# Altium PCB LKS_DEMO_V5.0.PcbDoc (part 3 of 4)
Units mil, origin at the board's own origin, x right, y up, seen from the top; angles counter-clockwise.
Board outline 5414.8 x 3354.56 mil, 2 copper layers (Top Layer, Bottom Layer); 131 components, 85 nets, 355 pads, 272 vias.
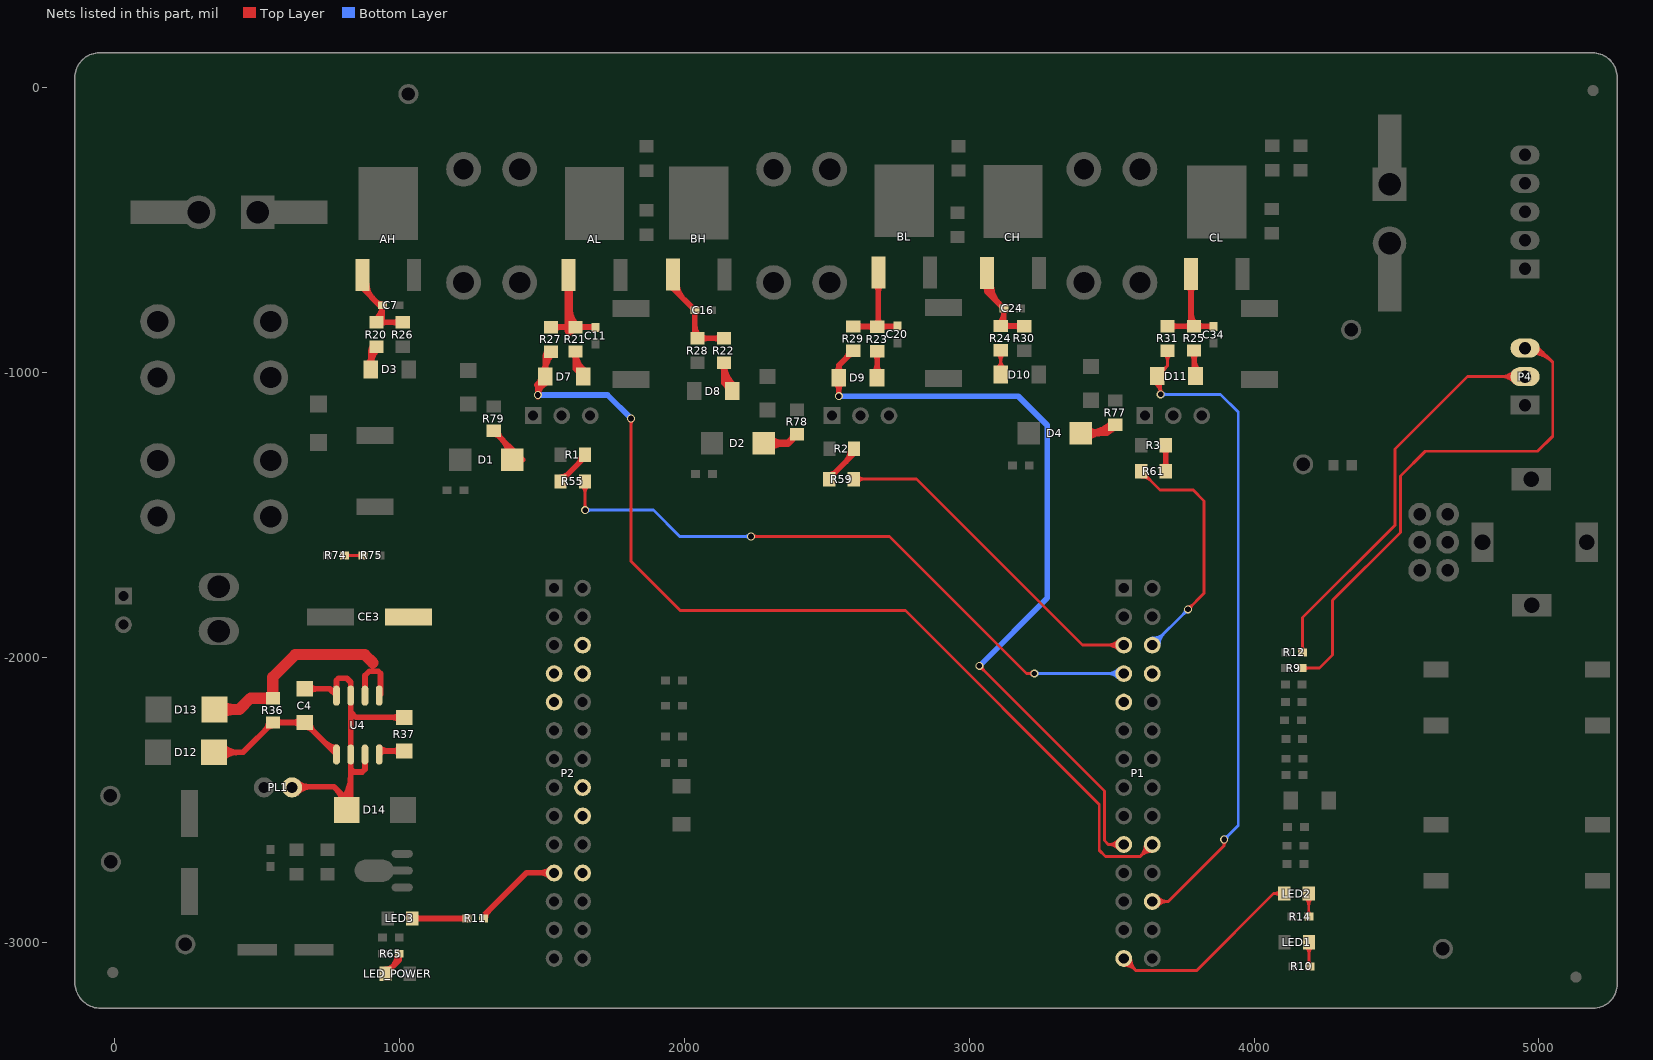
[diagram p3: the nets of this part, all layers, seen from the top]

## Via types
v1: diameter 26, hole 18, Top Layer to Bottom Layer, 117 vias
v2: diameter 28, hole 20, Top Layer to Bottom Layer, 77 vias
v3: diameter 28, hole 18, Top Layer to Bottom Layer, 73 vias
v4: diameter 23.62, hole 11.81, Top Layer to Bottom Layer, 5 vias

## Nets (pads, with @x,y where several pads share a name; then routed paths per layer and width w, separated by ;. In a path a pad name is that pad's centre, name@x,y a point inside that pad or via, vN(x,y) a via of type N, cw(c..) or ccw(c..) an arc to the next point about the centre after c; other vN are vias at no path point) (continued)
LED2: LED2.1 P1.14 | length 1103.3
  Top Layer w10: P1.14@3542.25,-3056.82 3584.65,-3099.22 3798.25,-3099.22 4068.35,-2829.12 ; LED2.1@4105.98,-2829.12 4068.35,-2829.12 ; 3567.05,-3081.62 ccw(c3542.25,-3106.42) 3542.25,-3071.34 cw(c3542.25,-3106.42) 3567.05,-3081.62 ; 3567.05,-3081.62 cw(c3591.85,-3056.82) 3556.78,-3056.82 ccw(c3591.85,-3056.82) 3567.05,-3081.62 ; 3584.12,-3098.69 ccw(c3542.25,-3140.56) 3542.25,-3081.34 cw(c3542.25,-3140.56) 3584.12,-3098.69 ; 3584.12,-3098.69 cw(c3625.99,-3056.82) 3566.78,-3056.82 ccw(c3625.99,-3056.82) 3584.12,-3098.69 ; 4068.35,-2829.12 ccw(c4068.35,-2794.93) 4093.65,-2817.92 cw(c4068.35,-2794.93) 4068.35,-2829.12 ; 4068.35,-2829.12 cw(c4068.35,-2863.3) 4093.65,-2840.31 ccw(c4068.35,-2863.3) 4068.35,-2829.12
LED3: P2.11 R11.2 | length 526.2
  Top Layer w20: R11.2@1295.18,-2916.6 1295.18,-2906.6 1446.24,-2755.53 P2.11@1540.97,-2755.53 ; R11.2@1300.93,-2916.6 cw(c1338.95,-2916.6) 1312.06,-2889.71 ccw(c1338.95,-2916.6) R11.2@1300.93,-2916.6 ; 1492.01,-2755.53 cw(c1492.01,-2807.06) 1528.44,-2770.62 ccw(c1492.01,-2807.06) 1492.01,-2755.53 ; 1498.2,-2755.53 ccw(c1498.2,-2712.77) 1528.44,-2743.01 cw(c1498.2,-2712.77) 1498.2,-2755.53
LO1: D11.2 P1.26 R31.1 | length 3359.8
  Top Layer w10: P1.26@3642.25,-2856.82 3698.24,-2856.82 ; v2(3671.64,-1076.41) 3671.63,-1023.64 D11.2@3660.13,-1012.14 3696.16,-976.11 ; R31.1@3696.16,-923.03 3696.16,-976.11 ; v2(3894.93,-2639.57) 3894.93,-2660.12 ; 3671.63,-1054.66 ccw(c3693.39,-1054.66) 3678,-1070.04 cw(c3693.39,-1054.66) 3671.63,-1054.66 ; 3671.63,-1054.7 cw(c3649.93,-1054.7) 3665.28,-1070.04 ccw(c3649.93,-1054.7) 3671.63,-1054.7 ; 3675.41,-2856.82 ccw(c3675.41,-2887.4) 3652.93,-2866.66 cw(c3675.41,-2887.4) 3675.41,-2856.82 ; 3675.41,-2856.82 cw(c3675.41,-2826.23) 3652.93,-2846.97 ccw(c3675.41,-2826.23) 3675.41,-2856.82 ; 3696.16,-976.11 cw(c3670.73,-950.68) 3663.99,-986.01 ccw(c3670.73,-950.68) 3696.16,-976.11 ; 3696.16,-963.23 ccw(c3655.95,-963.23) 3684.38,-934.8 cw(c3655.95,-963.23) 3696.16,-963.23 ; 3696.16,-963.23 cw(c3736.37,-963.23) 3707.94,-934.8 ccw(c3736.37,-963.23) 3696.16,-963.23 ; 3698.24,-2856.82 ccw(c3698.24,-2908.45) 3660.28,-2873.44 cw(c3698.24,-2908.45) 3698.24,-2856.82 ; 3698.24,-2856.82 cw(c3698.24,-2805.18) 3660.28,-2840.19 ccw(c3698.24,-2805.18) 3698.24,-2856.82 ; 3698.24,-2856.82 3894.93,-2660.12 ; 3894.93,-2660.12 ccw(c3875.97,-2660.12) 3888.83,-2646.19 cw(c3875.97,-2660.12) 3894.93,-2660.12 ; 3894.93,-2660.12 cw(c3913.89,-2660.12) 3901.03,-2646.19 ccw(c3913.89,-2660.12) 3894.93,-2660.12 ; D11.2@3648.83,-1035.25 cw(c3621.06,-1077.52) 3671.63,-1077.52 ccw(c3621.06,-1077.52) D11.2@3648.83,-1035.25 ; D11.2@3654.32,-1026.9 cw(c3633.24,-1058.99) 3671.63,-1058.99 ccw(c3633.24,-1058.99) D11.2@3654.32,-1026.9 ; D11.2@3662.12,-995.83 ccw(c3666.45,-973.11) 3682.8,-989.47 cw(c3666.45,-973.11) D11.2@3662.12,-995.83 ; D11.2@3680.72,-1006.23 cw(c3716.17,-1006.23) 3691.11,-981.16 ccw(c3716.17,-1006.23) D11.2@3680.72,-1006.23
  Bottom Layer w10: v2(3671.64,-1076.41) 3882.12,-1076.41 3944.39,-1138.68 3944.39,-2590.11 v2(3894.93,-2639.57) ; 3693.37,-1076.41 ccw(c3693.37,-1098.14) 3678,-1082.77 cw(c3693.37,-1098.14) 3693.37,-1076.41 ; 3693.37,-1076.41 cw(c3693.37,-1054.68) 3678,-1070.04 ccw(c3693.37,-1054.68) 3693.37,-1076.41 ; 3910.29,-2624.21 ccw(c3925.66,-2639.57) 3903.93,-2639.57 cw(c3925.66,-2639.57) 3910.29,-2624.21 ; 3910.29,-2624.21 cw(c3894.93,-2608.85) 3894.93,-2630.57 ccw(c3894.93,-2608.85) 3910.29,-2624.21
LO2: D9.2 P1.10 R29.1 | length 3418.4
  Top Layer w10: v2(3035.34,-2029.67) 3474.16,-2468.49 3474.16,-2643.33 3487.65,-2656.82 ; P1.10@3542.25,-2656.82 3487.65,-2656.82 ; 3050.71,-2045.04 ccw(c3035.34,-2060.4) 3035.34,-2038.67 cw(c3035.34,-2060.4) 3050.71,-2045.04 ; 3050.71,-2045.04 cw(c3066.07,-2029.67) 3044.34,-2029.67 ccw(c3066.07,-2029.67) 3050.71,-2045.04 ; 3487.65,-2656.82 ccw(c3487.65,-2608.31) 3523.91,-2640.53 cw(c3487.65,-2608.31) 3487.65,-2656.82 ; 3487.65,-2656.82 cw(c3487.65,-2705.32) 3523.91,-2673.11 ccw(c3487.65,-2705.32) 3487.65,-2656.82 ; 3509.91,-2656.82 ccw(c3509.91,-2628.09) 3531.39,-2647.17 cw(c3509.91,-2628.09) 3509.91,-2656.82 ; 3509.91,-2656.82 cw(c3509.91,-2685.55) 3531.39,-2666.46 ccw(c3509.91,-2685.55) 3509.91,-2656.82
  Top Layer w20: v2@2542,-1080.2 D9.2@2542,-1018.22 2542,-974.29 R29.1@2592.71,-923.58 ; 2542,-1061.76 ccw(c2504.36,-1061.76) 2530.98,-1035.15 cw(c2504.36,-1061.76) 2542,-1061.76 ; 2542,-1061.76 cw(c2579.64,-1061.76) 2553.03,-1035.15 ccw(c2579.64,-1061.76) 2542,-1061.76 ; 2542,-974.67 ccw(c2579.64,-974.67) 2553.03,-1001.29 cw(c2579.64,-974.67) 2542,-974.67 ; 2542,-974.67 cw(c2504.36,-974.67) 2530.98,-1001.29 ccw(c2504.36,-974.67) 2542,-974.67 ; 2567.1,-949.19 ccw(c2541.5,-923.58) 2577.71,-923.58 cw(c2541.5,-923.58) 2567.1,-949.19 ; R29.1@2575.18,-941.11 cw(c2589.36,-955.29) 2589.36,-935.24 ccw(c2589.36,-955.29) R29.1@2575.18,-941.11
  Bottom Layer w20: v2(2541.86,-1082.8) 3171.74,-1082.8 3273.63,-1184.7 3273.63,-1791.37 v2(3035.34,-2029.67)
LO3: D7.2 P1.24 R27.1 | length 4384.4
  Top Layer w10: v2(1812.37,-1160.96) 1812.37,-1662.33 1985.23,-1835.2 2775.6,-1835.2 3456.28,-2515.88 3456.28,-2677.23 3478.27,-2699.22 3599.85,-2699.22 P1.24@3638.22,-2660.84 ; 1812.37,-1182.68 ccw(c1790.64,-1182.68) 1806,-1167.32 cw(c1790.64,-1182.68) 1812.37,-1182.68 ; 1812.37,-1182.68 cw(c1834.1,-1182.68) 1818.73,-1167.32 ccw(c1834.1,-1182.68) 1812.37,-1182.68 ; 3600.38,-2698.69 ccw(c3558.51,-2656.82) 3617.72,-2656.82 cw(c3558.51,-2656.82) 3600.38,-2698.69 ; 3600.38,-2698.69 cw(c3642.25,-2740.56) 3642.25,-2681.34 ccw(c3642.25,-2740.56) 3600.38,-2698.69 ; 3617.45,-2681.62 ccw(c3592.65,-2656.82) 3627.72,-2656.82 cw(c3592.65,-2656.82) 3617.45,-2681.62 ; 3617.45,-2681.62 cw(c3642.25,-2706.42) 3642.25,-2671.34 ccw(c3642.25,-2706.42) 3617.45,-2681.62
  Top Layer w20: v2(1485.26,-1078.73) 1485.25,-1040.35 D7.2@1511.3,-1014.31 1511.3,-946.61 R27.1@1531.29,-926.62 ; 1511.29,-970.77 ccw(c1548.93,-970.77) 1522.32,-997.38 cw(c1548.93,-970.77) 1511.29,-970.77 ; 1511.3,-970.77 cw(c1473.66,-970.77) 1500.27,-997.38 ccw(c1473.66,-970.77) 1511.3,-970.77 ; 1482.3,-1043.31 cw(c1502.52,-1063.53) 1508.2,-1035.5 ccw(c1502.52,-1063.53) 1482.3,-1043.31 ; v2@1485.25,-1084.26 cw(c1539.73,-1084.26) 1517.62,-1034.47 ccw(c1539.73,-1084.26) v2@1485.25,-1084.26 ; 1485.25,-1053.49 cw(c1526.07,-1053.49) 1509.51,-1016.19 ccw(c1526.07,-1053.49) 1485.25,-1053.49 ; D7.2@1488.86,-1036.75 ccw(c1472.32,-1020.22) 1495.7,-1020.22 cw(c1472.32,-1020.22) D7.2@1488.86,-1036.75 ; D7.2@1511.29,-994.94 cw(c1596.27,-994.94) 1536.18,-934.86 ccw(c1596.27,-994.94) D7.2@1511.29,-994.94 ; R27.1@1511.3,-946.66 cw(c1547.99,-946.66) 1522.04,-920.71 ccw(c1547.99,-946.66) R27.1@1511.3,-946.66
  Bottom Layer w20: v2(1485.26,-1078.73) 1729.95,-1078.73 v2@1811.08,-1159.86
NetAH_1: AH.1 C7.1 R20.1 R26.2 | length 811.3
  Top Layer w20: AH.1@869.01,-654.65 869.01,-702.97 929.44,-763.4 C7.1@939.25,-763.4 ; R26.2@1010.36,-823.64 R20.1@918.27,-823.64 939.25,-802.67 C7.1@939.25,-763.4 ; C7.1@939.25,-763.4 cw(c874.31,-763.41) 914.42,-814.48 ccw(c874.31,-763.41) C7.1@939.25,-763.4 ; 949.75,-823.64 ccw(c949.75,-851.78) 929.86,-831.89 cw(c949.75,-851.78) 949.75,-823.64 ; 949.75,-823.64 cw(c949.75,-795.51) 929.86,-815.4 ccw(c949.75,-795.51) 949.75,-823.64 ; AH.1@884.52,-689.66 ccw(c954.1,-689.66) 904.9,-738.86 cw(c954.1,-689.66) AH.1@884.52,-689.66 ; 917.45,-751.41 ccw(c937.28,-731.58) 937.28,-759.63 cw(c937.28,-731.58) 917.45,-751.41 ; R20.1@926.77,-830.21 ccw(c906.62,-804.55) 939.25,-804.55 cw(c906.62,-804.55) R20.1@926.77,-830.21 ; 978.65,-823.64 cw(c978.65,-852.32) 998.93,-832.04 ccw(c978.65,-852.32) 978.65,-823.64 ; 979.42,-823.64 ccw(c979.42,-796.05) 998.93,-815.56 cw(c979.42,-796.05) 979.42,-823.64
NetAL_1: AL.1 C11.1 R21.1 R27.2 | length 760.3
  Top Layer w20: R27.2@1527.25,-839.83 C11.1@1687.64,-839.83 ; R27.2@1542.88,-849.23 cw(c1565.56,-871.91) 1565.56,-839.83 ccw(c1565.56,-871.91) R27.2@1542.88,-849.23 ; R27.2@1542.88,-832.75 ccw(c1559.98,-815.64) 1559.98,-839.83 cw(c1559.98,-815.64) R27.2@1542.88,-832.75 ; 1583.7,-839.83 cw(c1583.7,-870.45) 1605.36,-848.8 ccw(c1583.7,-870.45) 1583.7,-839.83 ; 1587.22,-839.83 ccw(c1587.22,-814.19) 1605.36,-832.32 cw(c1587.22,-814.19) 1587.22,-839.83 ; R21.1@1628.53,-848.8 cw(c1650.18,-870.45) 1650.18,-839.83 ccw(c1650.18,-870.45) R21.1@1628.53,-848.8 ; R21.1@1628.53,-832.32 ccw(c1646.66,-814.19) 1646.66,-839.83 cw(c1646.66,-814.19) R21.1@1628.53,-832.32
  Top Layer w30: R21.1@1593.54,-840.56 AL.1@1593.54,-657.72 ; R21.1@1593.54,-848.49 ccw(c1605.66,-848.49) 1597.09,-857.07 cw(c1605.66,-848.49) R21.1@1593.54,-848.49 ; 1593.54,-776.07 ccw(c1678.09,-776.07) 1618.3,-835.86 cw(c1678.09,-776.07) 1593.54,-776.07
NetBH_1: BH.1 C16.1 R22.1 R28.2 | length 714.4
  Top Layer w20: BH.1@1959.82,-653.06 1959.82,-704.49 C16.1@2036.35,-781.02 R28.2@2036.35,-870 ; R28.2@2046.11,-879.76 R22.1@2138.49,-879.76 ; 2077.59,-879.76 ccw(c2077.59,-907.89) 2057.69,-888 cw(c2077.59,-907.89) 2077.59,-879.76 ; 2077.59,-879.76 cw(c2077.59,-851.62) 2057.69,-871.52 ccw(c2077.59,-851.62) 2077.59,-879.76 ; BH.1@1974.12,-687.65 ccw(c2049.28,-687.65) 1996.13,-740.8 cw(c2049.28,-687.65) BH.1@1974.12,-687.65 ; 2036.35,-836.15 ccw(c2086.37,-836.15) 2051,-871.52 cw(c2086.37,-836.15) 2036.35,-836.15 ; 2106.85,-879.76 cw(c2106.85,-908.29) 2127.02,-888.11 ccw(c2106.85,-908.29) 2106.85,-879.76 ; 2107.41,-879.76 ccw(c2107.41,-852.02) 2127.02,-871.63 cw(c2107.41,-852.02) 2107.41,-879.76
NetBL_1: BL.1 C20.1 R23.1 R29.2 | length 803.9
  Top Layer w20: R29.2@2592.71,-837.95 C20.1@2745.87,-837.95 ; R23.1@2680.58,-835.25 BL.1@2680.58,-648.88 ; 2624.19,-837.95 ccw(c2624.19,-866.09) 2604.3,-846.2 cw(c2624.19,-866.09) 2624.19,-837.95 ; 2624.19,-837.95 cw(c2624.19,-809.82) 2604.3,-829.71 ccw(c2624.19,-809.82) 2624.19,-837.95 ; 2680.58,-715.64 ccw(c2645.32,-715.64) 2670.26,-690.7 cw(c2645.32,-715.64) 2680.58,-715.64 ; 2680.58,-715.64 cw(c2715.85,-715.64) 2690.91,-690.7 ccw(c2715.85,-715.64) 2680.58,-715.64 ; R23.1@2687.91,-831.27 ccw(c2704.06,-815.13) 2704.06,-837.95 cw(c2704.06,-815.13) R23.1@2687.91,-831.27 ; R23.1@2687.91,-831.27 cw(c2705.61,-813.57) 2680.58,-813.57 ccw(c2705.61,-813.57) R23.1@2687.91,-831.27 ; 2641.1,-837.95 cw(c2641.1,-871.39) 2664.74,-847.75 ccw(c2641.1,-871.39) 2641.1,-837.95 ; 2648.6,-837.95 ccw(c2648.6,-815.13) 2664.74,-831.27 cw(c2648.6,-815.13) 2648.6,-837.95 ; R23.1@2671.43,-831.27 ccw(c2649.34,-809.18) 2680.58,-809.18 cw(c2649.34,-809.18) R23.1@2671.43,-831.27 ; R23.1@2687.91,-847.75 cw(c2711.56,-871.39) 2711.56,-837.95 ccw(c2711.56,-871.39) R23.1@2687.91,-847.75
NetC24_1: C24.1 CH.1 R24.1 R30.2 | length 904.2
  Top Layer w20: CH.1@3061.3,-663.73 3061.3,-714.91 ; R24.1@3110.16,-836.37 R24.1@3121.14,-836.37 ; R24.1@3121.14,-839.76 R24.1@3121.14,-836.37 ; R30.2@3192.03,-836.37 R24.1@3121.14,-836.37 ; 3061.3,-714.95 cw(c3088.02,-714.95) 3071.7,-693.79 ccw(c3088.02,-714.95) 3061.3,-714.95 ; 3061.3,-714.91 C24.1@3121.14,-774.76 R24.1@3121.14,-836.37 ; 3141.64,-836.37 ccw(c3141.64,-864.5) 3121.75,-844.61 cw(c3141.64,-864.5) 3141.64,-836.37 ; 3141.64,-836.37 cw(c3141.64,-808.23) 3121.75,-828.13 ccw(c3141.64,-808.23) 3141.64,-836.37 ; CH.1@3052.45,-692.55 cw(c3031.1,-713.9) 3061.3,-713.9 ccw(c3031.1,-713.9) CH.1@3052.45,-692.55 ; CH.1@3057.41,-681.72 ccw(c3114.47,-687.04) 3073.95,-727.56 cw(c3114.47,-687.04) CH.1@3057.41,-681.72 ; CH.1@3077.32,-683.58 ccw(c3169.54,-692.18) 3104.05,-757.66 cw(c3169.54,-692.18) CH.1@3077.32,-683.58 ; R24.1@3105.27,-828.13 ccw(c3066.95,-789.81) 3121.14,-789.81 cw(c3066.95,-789.81) R24.1@3105.27,-828.13 ; 3159.27,-836.37 cw(c3159.27,-867.6) 3181.35,-845.52 ccw(c3159.27,-867.6) 3159.27,-836.37 ; 3163.65,-836.37 ccw(c3163.65,-811.34) 3181.35,-829.04 cw(c3163.65,-811.34) 3163.65,-836.37
NetC34_1: C34.1 CL.1 R25.1 R31.2 | length 818
  Top Layer w20: R31.2@3696.16,-837.4 R25.1@3778.11,-837.4 ; R25.1@3778.11,-837.99 R25.1@3778.11,-837.4 ; CL.1@3778.11,-642.68 R25.1@3778.11,-837.4 ; C34.1@3857.48,-837.4 R25.1@3778.11,-837.4 ; 3727.64,-837.4 ccw(c3727.64,-865.53) 3707.75,-845.64 cw(c3727.64,-865.53) 3727.64,-837.4 ; 3727.64,-837.4 cw(c3727.64,-809.26) 3707.75,-829.16 ccw(c3727.64,-809.26) 3727.64,-837.4 ; 3757.05,-837.4 ccw(c3757.05,-808.4) 3777.56,-828.9 cw(c3757.05,-808.4) 3757.05,-837.4 ; 3758.28,-837.4 cw(c3758.28,-864.67) 3777.56,-845.39 ccw(c3758.28,-864.67) 3758.28,-837.4 ; CL.1@3768.16,-695.16 cw(c3744.14,-719.18) 3778.11,-719.18 ccw(c3744.14,-719.18) CL.1@3768.16,-695.16 ; 3778.11,-790.45 ccw(c3832.5,-790.45) 3794.04,-828.9 cw(c3832.5,-790.45) 3778.11,-790.45 ; 3778.11,-721.01 cw(c3814.67,-721.01) 3788.82,-695.16 ccw(c3814.67,-721.01) 3778.11,-721.01 ; R25.1@3800.73,-845.39 cw(c3820.02,-864.67) 3820.02,-837.4 ccw(c3820.02,-864.67) R25.1@3800.73,-845.39 ; R25.1@3800.73,-828.9 ccw(c3821.24,-808.4) 3821.24,-837.4 cw(c3821.24,-808.4) R25.1@3800.73,-828.9
NetCF1_1: CE3.1 D13.2 R36.2 U4.5 U4.6 | length 1127.5
  Top Layer w20: U4.6@878.24,-2134.07 878.24,-2063.8 893.82,-2048.21 924.43,-2048.21 932.49,-2056.26 932.49,-2129.81 U4.5@928.24,-2134.07 ; U4.5@926.82,-2109.22 ccw(c913.14,-2095.54) 932.49,-2095.54 cw(c913.14,-2095.54) U4.5@926.82,-2109.22
  Top Layer w40: D13.2@350,-2182.97 436.59,-2182.97 476.64,-2142.91 R36.2@554.9,-2142.91 554.9,-2068.88 634.08,-1989.7 876.84,-1989.7 906.05,-2018.91 ; 411.02,-2182.97 ccw(c411.02,-2243.99) 367.87,-2200.84 cw(c411.02,-2243.99) 411.02,-2182.97 ; 411.02,-2182.97 cw(c411.02,-2121.95) 367.87,-2165.09 ccw(c411.02,-2121.95) 411.02,-2182.97
NetCF2_1: C4.1 D12.2 R36.1 U4.1 | length 1323.8
  Top Layer w20: D12.2@348.55,-2333.06 450.38,-2333.06 R36.1@554.9,-2228.54 555.19,-2228.25 C4.1@666.53,-2228.25 U4.1@778.24,-2339.96 ; 433.72,-2333.06 ccw(c433.72,-2418.23) 373.5,-2358.01 cw(c433.72,-2418.23) 433.72,-2333.06 ; 433.72,-2333.06 cw(c433.72,-2247.9) 373.5,-2308.12 ccw(c433.72,-2247.9) 433.72,-2333.06 ; 624.54,-2228.25 ccw(c624.54,-2188.24) 652.84,-2216.53 cw(c624.54,-2188.24) 624.54,-2228.25 ; 624.54,-2228.25 cw(c624.54,-2268.27) 652.84,-2239.97 ccw(c624.54,-2268.27) 624.54,-2228.25 ; 529.3,-2254.15 ccw(c503.69,-2228.54) 539.9,-2228.54 cw(c503.69,-2228.54) 529.3,-2254.15 ; R36.1@537.38,-2246.07 cw(c551.56,-2260.25) 551.56,-2240.19 ccw(c551.56,-2260.25) R36.1@537.38,-2246.07 ; R36.1@566.49,-2236.78 cw(c587.07,-2257.36) 587.07,-2228.25 ccw(c587.07,-2257.36) R36.1@566.49,-2236.78 ; R36.1@566.49,-2220.3 ccw(c585.7,-2201.09) 585.7,-2228.25 cw(c585.7,-2201.09) R36.1@566.49,-2220.3 ; C4.1@668.5,-2244.83 cw(c668.5,-2280.09) 693.43,-2255.16 ccw(c668.5,-2280.09) C4.1@668.5,-2244.83 ; C4.1@685.07,-2228.25 ccw(c729.84,-2228.25) 698.18,-2259.91 cw(c729.84,-2228.25) C4.1@685.07,-2228.25 ; 736.7,-2298.43 ccw(c778.24,-2256.89) 778.24,-2315.63 cw(c778.24,-2256.89) 736.7,-2298.43 ; U4.1@770.84,-2332.57 ccw(c778.24,-2325.18) 778.24,-2335.63 cw(c778.24,-2325.18) U4.1@770.84,-2332.57
NetCF2_2: C4.2 D14.2 PL1.2 R37.2 U4.2 U4.3 U4.7 U4.8 | length 2328.9
  Top Layer w20: PL1.2@622.13,-2453.71 768.46,-2453.71 D14.2@814.33,-2499.58 ; C4.2@666.53,-2110.14 754.32,-2110.14 U4.8@778.24,-2134.07 778.24,-2081 785.96,-2073.27 814.08,-2073.27 828.24,-2087.43 828.24,-2510.27 D14.2@814.33,-2524.18 ; D14.2@814.33,-2535.22 D14.2@814.33,-2496.56 ; 828.24,-2391.62 838.97,-2402.35 868.32,-2402.35 878.24,-2392.44 U4.3@878.24,-2341.07 ; 828.24,-2191.87 846.94,-2210.57 R37.2@1016.47,-2210.57 ; 708.51,-2110.14 ccw(c708.51,-2150.16) 680.22,-2121.86 cw(c708.51,-2150.16) 708.51,-2110.14 ; 708.51,-2110.14 cw(c708.51,-2070.13) 680.22,-2098.42 ccw(c708.51,-2070.13) 708.51,-2110.14 ; 974.49,-2210.57 ccw(c974.49,-2170.55) 1002.79,-2198.85 cw(c974.49,-2170.55) 974.49,-2210.57 ; 974.49,-2210.57 cw(c974.49,-2250.58) 1002.79,-2222.29 ccw(c974.49,-2250.58) 974.49,-2210.57 ; PL1.2@640.11,-2474.41 cw(c690.08,-2524.37) 690.08,-2453.71 ccw(c690.08,-2524.37) PL1.2@640.11,-2474.41 ; PL1.2@640.11,-2438.44 ccw(c676.98,-2401.57) 676.98,-2453.71 cw(c676.98,-2401.57) PL1.2@640.11,-2438.44 ; 777.6,-2462.85 cw(c722.1,-2518.34) 799.3,-2532.47 ccw(c722.1,-2518.34) 777.6,-2462.85 ; D14.2@789.38,-2510.28 ccw(c695.59,-2416.48) 828.24,-2416.48 cw(c695.59,-2416.48) D14.2@789.38,-2510.28 ; D14.2@803.53,-2524.42 ccw(c743.87,-2464.76) 828.24,-2464.76 cw(c743.87,-2464.76) D14.2@803.53,-2524.42 ; 804.55,-2489.8 cw(c767.67,-2526.68) 818.98,-2536.07 ccw(c767.67,-2526.68) 804.55,-2489.8 ; 828.24,-2483.64 ccw(c865.91,-2483.64) 839.27,-2510.28 cw(c865.91,-2483.64) 828.24,-2483.64
NetD1_2: D1.2 R79.2 | length 498.1
  Top Layer w20: R79.2@1329.96,-1204.56 D1.2@1431.45,-1306.06 ; R79.2@1333.31,-1216.22 cw(c1333.31,-1236.27) 1347.49,-1222.09 ccw(c1333.31,-1236.27) R79.2@1333.31,-1216.22 ; R79.2@1344.96,-1204.56 ccw(c1381.17,-1204.56) 1355.57,-1230.17 cw(c1381.17,-1204.56) R79.2@1344.96,-1204.56 ; 1354.15,-1228.75 cw(c1277.16,-1305.74) 1386.04,-1305.74 ccw(c1277.16,-1305.74) 1354.15,-1228.75 ; 1388.29,-1262.9 cw(c1345.45,-1305.74) 1406.04,-1305.74 ccw(c1345.45,-1305.74) 1388.29,-1262.9
NetD2_2: D2.2 R78.2 | length 381.2
  Top Layer w25: D2.2@2278.58,-1248.27 2363.15,-1248.27 R78.2@2395.27,-1216.16 ; 2343.45,-1248.28 ccw(c2343.45,-1313.15) 2297.58,-1267.28 cw(c2343.45,-1313.15) 2343.45,-1248.28 ; 2343.45,-1248.27 cw(c2343.45,-1183.4) 2297.58,-1229.27 ccw(c2343.45,-1183.4) 2343.45,-1248.27 ; R78.2@2373.93,-1237.5 ccw(c2352.59,-1216.16) 2382.77,-1216.16 cw(c2352.59,-1216.16) R78.2@2373.93,-1237.5
NetD3_1: D3.1 R20.2 | length 394.2
  Top Layer w20: D3.1@898.55,-988.88 898.55,-929 R20.2@918.27,-909.27 ; 898.55,-945.33 ccw(c936.19,-945.33) 909.57,-971.95 cw(c936.19,-945.33) 898.55,-945.33 ; 898.55,-945.33 cw(c860.91,-945.33) 887.52,-971.95 ccw(c860.91,-945.33) 898.55,-945.33 ; D3.1@898.55,-976.95 cw(c982.6,-976.95) 923.17,-917.52 ccw(c982.6,-976.95) D3.1@898.55,-976.95 ; R20.2@898.55,-928.66 cw(c934.31,-928.66) 909.02,-903.37 ccw(c934.31,-928.66) R20.2@898.55,-928.66
NetD4_2: D4.2 R77.2 | length 775.5
  Top Layer w20: D4.2@3391.45,-1213.21 3482.43,-1213.21 R77.2@3512.15,-1183.48 ; 3462.36,-1213.21 ccw(c3462.36,-1284.11) 3412.22,-1233.98 cw(c3462.36,-1284.11) 3462.36,-1213.21 ; 3462.36,-1213.21 cw(c3462.36,-1142.3) 3412.22,-1192.44 ccw(c3462.36,-1142.3) 3462.36,-1213.21 ; D4.2@3408.91,-1213.21 ccw(c3408.91,-1083.59) 3500.57,-1175.24 cw(c3408.91,-1083.59) D4.2@3408.91,-1213.21 ; 3457.2,-1213.21 ccw(c3457.2,-1131.88) 3514.71,-1189.39 cw(c3457.2,-1131.88) 3457.2,-1213.21 ; 3486.55,-1209.09 ccw(c3460.94,-1183.48) 3497.15,-1183.48 cw(c3460.94,-1183.48) 3486.55,-1209.09 ; R77.2@3494.63,-1201.01 cw(c3508.81,-1215.19) 3508.81,-1195.14 ccw(c3508.81,-1215.19) R77.2@3494.63,-1201.01
NetD7_1: D7.1 R21.2 | length 546
  Top Layer w20: D7.1@1645.15,-1014.31 1616.94,-986.1 R21.2@1616.94,-926.19 ; 1616.94,-954.32 ccw(c1588.81,-954.32) 1608.7,-934.43 cw(c1588.81,-954.32) 1616.94,-954.32 ; 1616.94,-954.32 cw(c1645.08,-954.32) 1625.18,-934.43 ccw(c1645.08,-954.32) 1616.94,-954.32 ; R21.2@1616.94,-926.19 ccw(c1700.41,-926.19) 1653.85,-995.47 cw(c1700.41,-926.19) R21.2@1616.94,-926.19 ; 1616.94,-963.73 ccw(c1675.18,-963.73) 1642.69,-1012.07 cw(c1675.18,-963.73) 1616.94,-963.73 ; D7.1@1619.9,-989.06 ccw(c1633.66,-975.3) 1640.04,-993.68 cw(c1633.66,-975.3) D7.1@1619.9,-989.06 ; D7.1@1622.71,-991.87 cw(c1606.18,-1008.41) 1629.56,-1008.41 ccw(c1606.18,-1008.41) D7.1@1622.71,-991.87
NetD8_1: D8.1 R22.2 | length 597.7
  Top Layer w20: R22.2@2138.61,-965.5 2138.61,-1036.36 D8.1@2167.67,-1065.43 ; 2138.61,-993.64 ccw(c2110.47,-993.64) 2130.37,-973.74 cw(c2110.47,-993.64) 2138.61,-993.64 ; 2138.61,-993.64 cw(c2166.74,-993.64) 2146.85,-973.74 ccw(c2166.74,-993.64) 2138.61,-993.64 ; 2138.61,-1007.62 ccw(c2209.99,-1007.62) 2164.88,-1062.94 cw(c2209.99,-1007.62) 2138.61,-1007.62 ; R22.2@2138.61,-965.5 ccw(c2244.32,-965.51) 2177.52,-1047.44 cw(c2244.32,-965.51) R22.2@2138.61,-965.5 ; 2141.56,-1039.32 ccw(c2156.71,-1024.17) 2163.05,-1044.63 cw(c2156.71,-1024.17) 2141.56,-1039.32 ; D8.1@2145.23,-1042.99 cw(c2128.7,-1059.52) 2152.08,-1059.52 ccw(c2128.7,-1059.52) D8.1@2145.23,-1042.99
NetD9_1: D9.1 R23.2 | length 299.2
  Top Layer w20: D9.1@2676.33,-1017.75 R23.2@2676.33,-925.14 ; 2676.33,-953.27 ccw(c2648.19,-953.27) 2668.09,-933.38 cw(c2648.19,-953.27) 2676.33,-953.27 ; 2676.33,-953.27 cw(c2704.46,-953.27) 2684.57,-933.38 ccw(c2704.46,-953.27) 2676.33,-953.27 ; D9.1@2664.83,-1001.29 ccw(c2637.09,-973.54) 2676.33,-973.54 cw(c2637.09,-973.54) D9.1@2664.83,-1001.29 ; 2676.33,-975.81 ccw(c2712.37,-975.81) 2686.88,-1001.29 cw(c2712.37,-975.81) 2676.33,-975.81
NetD10_1: D10.1 R24.2 | length 409.3
  Top Layer w10: D10.1@3110.16,-1007.24 R24.2@3110.16,-922 ; 3110.16,-962.2 ccw(c3069.96,-962.2) 3098.39,-933.77 cw(c3069.96,-962.2) 3110.16,-962.2 ; 3110.16,-962.2 cw(c3150.37,-962.2) 3121.94,-933.77 ccw(c3150.37,-962.2) 3110.16,-962.2 ; D10.1@3095.87,-987.04 ccw(c3061.37,-952.54) 3110.16,-952.54 cw(c3061.37,-952.54) D10.1@3095.87,-987.04 ; 3110.16,-975.39 ccw(c3136.64,-975.39) 3117.92,-994.12 cw(c3136.64,-975.39) 3110.16,-975.39 ; 3110.16,-951.25 ccw(c3160.79,-951.25) 3124.99,-987.04 cw(c3160.79,-951.25) 3110.16,-951.25
NetD11_1: D11.1 R25.2 | length 291.2
  Top Layer w20: D11.1@3789.15,-1007.3 R25.2@3789.15,-922.77 ; 3789.15,-950.91 ccw(c3761.01,-950.91) 3780.91,-931.02 cw(c3761.01,-950.91) 3789.15,-950.91 ; 3789.15,-950.91 cw(c3817.28,-950.91) 3797.39,-931.02 ccw(c3817.28,-950.91) 3789.15,-950.91 ; D11.1@3782.96,-995.21 ccw(c3768.04,-980.29) 3789.15,-980.29 cw(c3768.04,-980.29) D11.1@3782.96,-995.21 ; 3789.15,-956.9 ccw(c3843.32,-956.9) 3805.01,-995.21 cw(c3843.32,-956.9) 3789.15,-956.9
NetLED1_2: LED1.2 R10.1 | length 278.7
  Top Layer w10: LED1.2@4192.4,-3000.22 4192.4,-3081.09 R10.1@4195.91,-3084.6 ; 4192.4,-3043.77 ccw(c4152.2,-3043.77) 4180.62,-3015.34 cw(c4152.2,-3043.77) 4192.4,-3043.77 ; 4192.4,-3043.77 cw(c4232.61,-3043.77) 4204.18,-3015.34 ccw(c4232.61,-3043.77) 4192.4,-3043.77 ; R10.1@4187.73,-3078.39 ccw(c4176.46,-3067.12) 4192.4,-3067.12 cw(c4176.46,-3067.12) R10.1@4187.73,-3078.39 ; 4192.4,-3059.69 ccw(c4218.85,-3059.69) 4200.15,-3078.39 cw(c4218.85,-3059.69) 4192.4,-3059.69
NetLED2_2: LED2.2 R14.1 | length 273.2
  Top Layer w10: R14.1@4191.61,-2909.42 LED2.2@4191.61,-2829.12 ; 4191.61,-2872.67 ccw(c4151.4,-2872.67) 4179.83,-2844.24 cw(c4151.4,-2872.67) 4191.61,-2872.67 ; 4191.61,-2872.67 cw(c4231.81,-2872.67) 4203.38,-2844.24 ccw(c4231.81,-2872.67) 4191.61,-2872.67 ; R14.1@4185.79,-2903.61 ccw(c4171.76,-2889.57) 4191.61,-2889.57 cw(c4171.76,-2889.57) R14.1@4185.79,-2903.61 ; 4191.61,-2887.67 ccw(c4214.15,-2887.67) 4198.21,-2903.61 cw(c4214.15,-2887.67) 4191.61,-2887.67
NetLED3_1: LED3.1 R11.1 | length 278.1
  Top Layer w20: LED3.1@1043.88,-2916.56 R11.1@1233.59,-2916.56 ; 1072.01,-2916.56 ccw(c1072.01,-2944.69) 1052.12,-2924.8 cw(c1072.01,-2944.69) 1072.01,-2916.56 ; 1072.01,-2916.56 cw(c1072.01,-2888.42) 1052.12,-2908.32 ccw(c1072.01,-2888.42) 1072.01,-2916.56
NetLED_POWER_1: LED_POWER.1 R65.2 | length 284.3
  Top Layer w20: LED_POWER.1@950.38,-3110.82 998.63,-3062.57 R65.2@998.63,-3040.48 ; LED_POWER.1@950.38,-3095.82 ccw(c950.38,-3059.61) 975.99,-3085.21 cw(c950.38,-3059.61) LED_POWER.1@950.38,-3095.82 ; LED_POWER.1@962.03,-3107.47 cw(c982.09,-3107.47) 967.91,-3093.29 ccw(c982.09,-3107.47) LED_POWER.1@962.03,-3107.47 ; 973.2,-3088 ccw(c925.68,-3040.48) 992.88,-3040.48 cw(c925.68,-3040.48) 973.2,-3088
NetP13_2: P4.2 R12.1 | length 1833.7
  Top Layer w10: R12.1@4170.04,-1982.47 4170.04,-1860.24 4494.03,-1536.25 4494.03,-1268.84 4748.7,-1014.16 P4.2@4951.92,-1014.16 ; 4170.04,-1961.28 ccw(c4191.24,-1961.28) 4176.25,-1976.27 cw(c4191.24,-1961.28) 4170.04,-1961.28 ; 4170.04,-1961.28 cw(c4148.85,-1961.28) 4163.84,-1976.27 ccw(c4148.85,-1961.28) 4170.04,-1961.28 ; 4864.54,-1014.16 ccw(c4864.54,-945.44) 4913.13,-994.03 cw(c4864.54,-945.44) 4864.54,-1014.16 ; 4864.54,-1014.16 cw(c4864.54,-1082.88) 4913.13,-1034.29 ccw(c4864.54,-1082.88) 4864.54,-1014.16 ; 4888.69,-1014.16 ccw(c4888.69,-969.58) 4920.21,-1001.1 cw(c4888.69,-969.58) 4888.69,-1014.16 ; 4888.69,-1014.16 cw(c4888.69,-1058.74) 4920.21,-1027.22 ccw(c4888.69,-1058.74) 4888.69,-1014.16
NetP13_3: P4.3 R9.2 | length 2299.8
  Top Layer w10: R9.2@4168.67,-2037.33 4229.85,-2037.33 4275.27,-1991.91 4275.27,-1799.57 4513.64,-1561.2 4513.64,-1363.11 4600.6,-1276.15 4995.32,-1276.15 5048.21,-1223.26 5048.21,-963.84 4998.53,-914.16 P4.3@4950.98,-914.16 ; 4191.83,-2037.33 ccw(c4191.83,-2058.52) 4176.84,-2043.54 cw(c4191.83,-2058.52) 4191.83,-2037.33 ; 4191.83,-2037.33 cw(c4191.83,-2016.13) 4176.84,-2031.12 ccw(c4191.83,-2016.13) 4191.83,-2037.33 ; P4.3@4968.63,-912.63 cw(c4971.4,-974.22) 5015,-930.62 ccw(c4971.4,-974.22) P4.3@4968.63,-912.63 ; P4.3@4969.08,-922.62 cw(c4972.78,-1004.93) 5031.04,-946.67 ccw(c4972.78,-1004.93) P4.3@4969.08,-922.62 ; P4.3@4969.52,-932.61 cw(c4974.16,-1035.63) 5047.08,-962.71 ccw(c4974.16,-1035.63) P4.3@4969.52,-932.61
NetR1_1: R1.1 R55.2 | length 271.8
  Top Layer w20: R55.2@1564.85,-1382.3 R1.1@1650.48,-1296.67 ; R55.2@1564.85,-1367.3 ccw(c1564.85,-1331.09) 1590.46,-1356.69 cw(c1564.85,-1331.09) R55.2@1564.85,-1367.3 ; R55.2@1576.51,-1378.95 cw(c1596.56,-1378.95) 1582.38,-1364.77 ccw(c1596.56,-1378.95) R55.2@1576.51,-1378.95 ; 1627.21,-1319.94 ccw(c1599.16,-1291.89) 1638.83,-1291.89 cw(c1599.16,-1291.89) 1627.21,-1319.94
NetR2_1: R2.1 R59.2 | length 314.7
  Top Layer w20: R59.2@2512.6,-1366.52 2594.94,-1284.17 R2.1@2594.94,-1267.81 ; R59.2@2508.65,-1359.16 ccw(c2508.65,-1331.87) 2527.95,-1351.17 cw(c2508.65,-1331.87) R59.2@2508.65,-1359.16 ; R59.2@2520.3,-1370.81 cw(c2549.28,-1370.81) 2528.79,-1350.33 ccw(c2549.28,-1370.81) R59.2@2520.3,-1370.81 ; 2565.85,-1313.27 ccw(c2523.74,-1271.16) 2583.29,-1271.16 cw(c2523.74,-1271.16) 2565.85,-1313.27
NetR3_1: R3.1 R61.2 | length 267.6
  Top Layer w20: R61.2@3689.55,-1346.42 R3.1@3689.51,-1255.52 ; 3689.51,-1287 ccw(c3661.38,-1287) 3681.27,-1267.1 cw(c3661.38,-1287) 3689.51,-1287 ; 3689.51,-1287 cw(c3717.65,-1287) 3697.75,-1267.1 ccw(c3717.65,-1287) 3689.51,-1287 ; R61.2@3681.3,-1334.84 ccw(c3661.49,-1315.02) 3689.51,-1315.02 cw(c3661.49,-1315.02) R61.2@3681.3,-1334.84 ; 3689.51,-1314.87 ccw(c3717.75,-1314.87) 3697.79,-1334.84 cw(c3717.75,-1314.87) 3689.51,-1314.87
NetR74_2: R74.2 R75.1 | length 199.3
  Top Layer w10: R74.2@805.68,-1641.8 R75.1@871.84,-1641.8 ; 828.84,-1641.8 ccw(c828.84,-1663) 813.86,-1648.01 cw(c828.84,-1663) 828.84,-1641.8 ; 828.84,-1641.8 cw(c828.84,-1620.61) 813.86,-1635.6 ccw(c828.84,-1620.61) 828.84,-1641.8 ; 848.65,-1641.8 ccw(c848.65,-1620.58) 863.66,-1635.59 cw(c848.65,-1620.58) 848.65,-1641.8 ; 848.69,-1641.8 cw(c848.69,-1662.97) 863.66,-1648 ccw(c848.69,-1662.97) 848.69,-1641.8
NetRP2_1: R37.1 U4.4 | length 285.9
  Top Layer w20: U4.4@928.24,-2341.07 940.62,-2328.68 R37.1@1016.47,-2328.68 ; 974.49,-2328.68 ccw(c974.49,-2288.66) 1002.79,-2316.96 cw(c974.49,-2288.66) 974.49,-2328.68 ; 974.49,-2328.68 cw(c974.49,-2368.69) 1002.79,-2340.4 ccw(c974.49,-2368.69) 974.49,-2328.68 ; U4.4@929.65,-2316.22 ccw(c959.73,-2286.14) 959.73,-2328.68 cw(c959.73,-2286.14) U4.4@929.65,-2316.22
NRST: P2.23
OC: P2.4
P0.0: P2.22
P0.4: P2.25
P1.10: P1.5
P1.11: P1.18
P2.2: P2.18
P2.3: P2.5
P2.10: P2.17
PA: P1.4 R55.1 | length 3060.1
  Top Layer w10: v2@1650.48,-1482.37 R55.1@1650.48,-1382.3 ; v2(2233.4,-1575.15) 2719.74,-1575.14 3201.03,-2056.43 v3(3228,-2056.43) ; 1650.48,-1425.85 ccw(c1610.28,-1425.85) 1638.71,-1397.42 cw(c1610.28,-1425.85) 1650.48,-1425.85 ; 1650.48,-1425.85 cw(c1690.69,-1425.85) 1662.26,-1397.42 ccw(c1690.69,-1425.85) 1650.48,-1425.85 ; 3206.27,-2056.43 ccw(c3206.27,-2034.7) 3221.64,-2050.07 cw(c3206.27,-2034.7) 3206.27,-2056.43 ; 3206.27,-2056.43 cw(c3206.27,-2078.16) 3221.64,-2062.8 ccw(c3206.27,-2078.16) 3206.27,-2056.43 ; v2@1645.14,-1476.47 ccw(c1632.25,-1463.58) 1650.48,-1463.58 cw(c1632.25,-1463.58) v2@1645.14,-1476.47 ; 1650.48,-1458.63 ccw(c1675.71,-1458.63) 1657.87,-1476.47 cw(c1675.71,-1458.63) 1650.48,-1458.63 ; v2@2239.76,-1581.52 cw(c2255.15,-1596.9) 2255.15,-1575.14 ccw(c2255.15,-1596.9) v2@2239.76,-1581.52 ; v2@2239.76,-1568.79 ccw(c2255.1,-1553.45) 2255.1,-1575.14 cw(c2255.1,-1553.45) v2@2239.76,-1568.79
  Bottom Layer w10: v2(1651.51,-1482.83) 1890.86,-1482.83 1983.17,-1575.15 v2(2233.4,-1575.15) ; v3(3228,-2056.43) P1.4@3541.86,-2056.43 ; 1673.23,-1482.83 ccw(c1673.23,-1504.56) 1657.87,-1489.2 cw(c1673.23,-1504.56) 1673.23,-1482.83 ; 1673.23,-1482.83 cw(c1673.23,-1461.11) 1657.87,-1476.47 ccw(c1673.23,-1461.11) 1673.23,-1482.83 ; 2211.67,-1575.15 ccw(c2211.67,-1553.43) 2227.03,-1568.79 cw(c2211.67,-1553.43) 2211.67,-1575.15 ; 2211.67,-1575.15 cw(c2211.67,-1596.88) 2227.03,-1581.52 ccw(c2211.67,-1596.88) 2211.67,-1575.15 ; 3249.73,-2056.43 ccw(c3249.73,-2078.16) 3234.36,-2062.8 cw(c3249.73,-2078.16) 3249.73,-2056.43 ; 3249.73,-2056.43 cw(c3249.73,-2034.7) 3234.36,-2050.07 ccw(c3249.73,-2034.7) 3249.73,-2056.43 ; 3482.11,-2056.43 cw(c3482.11,-2116.96) 3524.91,-2074.16 ccw(c3482.11,-2116.96) 3482.11,-2056.43 ; 3483.96,-2056.43 ccw(c3483.96,-1998.53) 3524.91,-2039.47 cw(c3483.96,-1998.53) 3483.96,-2056.43 ; 3506.25,-2056.43 cw(c3506.25,-2092.82) 3531.98,-2067.09 ccw(c3506.25,-2092.82) 3506.25,-2056.43 ; 3508.1,-2056.43 ccw(c3508.1,-2022.67) 3531.98,-2046.54 cw(c3508.1,-2022.67) 3508.1,-2056.43
PB: P1.3 R59.1 | length 1611.8
  Top Layer w10: R59.1@2594.28,-1374.16 2814.25,-1374.16 3396.9,-1956.82 P1.3@3542.25,-1956.82 ; 2634.48,-1374.16 ccw(c2634.48,-1414.37) 2606.06,-1385.94 cw(c2634.48,-1414.37) 2634.48,-1374.16 ; 2634.48,-1374.16 cw(c2634.48,-1333.96) 2606.06,-1362.39 ccw(c2634.48,-1333.96) 2634.48,-1374.16 ; 3483.03,-1956.82 ccw(c3483.03,-1897.6) 3524.91,-1939.47 cw(c3483.03,-1897.6) 3483.03,-1956.82 ; 3483.03,-1956.82 cw(c3483.03,-2016.03) 3524.91,-1974.16 ccw(c3483.03,-2016.03) 3483.03,-1956.82 ; 3507.18,-1956.82 ccw(c3507.18,-1921.74) 3531.98,-1946.54 cw(c3507.18,-1921.74) 3507.18,-1956.82 ; 3507.18,-1956.82 cw(c3507.18,-1991.89) 3531.98,-1967.09 ccw(c3507.18,-1991.89) 3507.18,-1956.82
PC: P1.17 R61.1 | length 1442.6
  Top Layer w10: R61.1@3603.91,-1346.42 3669.79,-1412.3 3786.06,-1412.3 3824.19,-1450.42 3824.19,-1774.88 v2@3767.28,-1831.79 ; R61.1@3603.91,-1366.42 cw(c3603.91,-1414.71) 3638.06,-1380.57 ccw(c3603.91,-1414.71) R61.1@3603.91,-1366.42 ; R61.1@3603.91,-1356.42 cw(c3603.91,-1380.57) 3620.99,-1363.49 ccw(c3603.91,-1380.57) R61.1@3603.91,-1356.42 ; R61.1@3620.57,-1349.77 ccw(c3652.69,-1349.77) 3629.98,-1372.49 cw(c3652.69,-1349.77) R61.1@3620.57,-1349.77 ; v2@3767.66,-1822.43 ccw(c3767.66,-1800.74) 3782.99,-1816.08 cw(c3767.66,-1800.74) v2@3767.66,-1822.43 ; v2@3776.66,-1831.43 cw(c3798.43,-1831.43) 3783.03,-1816.03 ccw(c3798.43,-1831.43) v2@3776.66,-1831.43
  Bottom Layer w10: P1.17@3642.25,-1956.82 v2(3767.66,-1831.43) ; 3667.05,-1932.02 ccw(c3691.85,-1956.82) 3656.78,-1956.82 cw(c3691.85,-1956.82) 3667.05,-1932.02 ; 3667.05,-1932.02 cw(c3642.25,-1907.22) 3642.25,-1942.29 ccw(c3642.25,-1907.22) 3667.05,-1932.02 ; 3684.12,-1914.94 ccw(c3725.99,-1956.82) 3666.78,-1956.82 cw(c3725.99,-1956.82) 3684.12,-1914.94 ; 3684.12,-1914.94 cw(c3642.25,-1873.07) 3642.25,-1932.29 ccw(c3642.25,-1873.07) 3684.12,-1914.94 ; 3752.26,-1846.8 cw(c3767.66,-1862.2) 3767.66,-1840.43 ccw(c3767.66,-1862.2) 3752.26,-1846.8 ; 3752.3,-1846.76 ccw(c3736.97,-1831.43) 3758.66,-1831.43 cw(c3736.97,-1831.43) 3752.3,-1846.76